# Altium PCB Two Stage Instrumentation Amplifier.PcbDoc
Units mil, origin at the board's own origin, x right, y up, seen from the top; angles counter-clockwise.
Board outline 4815 x 2205 mil, 2 copper layers (Top Layer, Bottom Layer); 61 components, 49 nets, 554 pads, 9 vias.
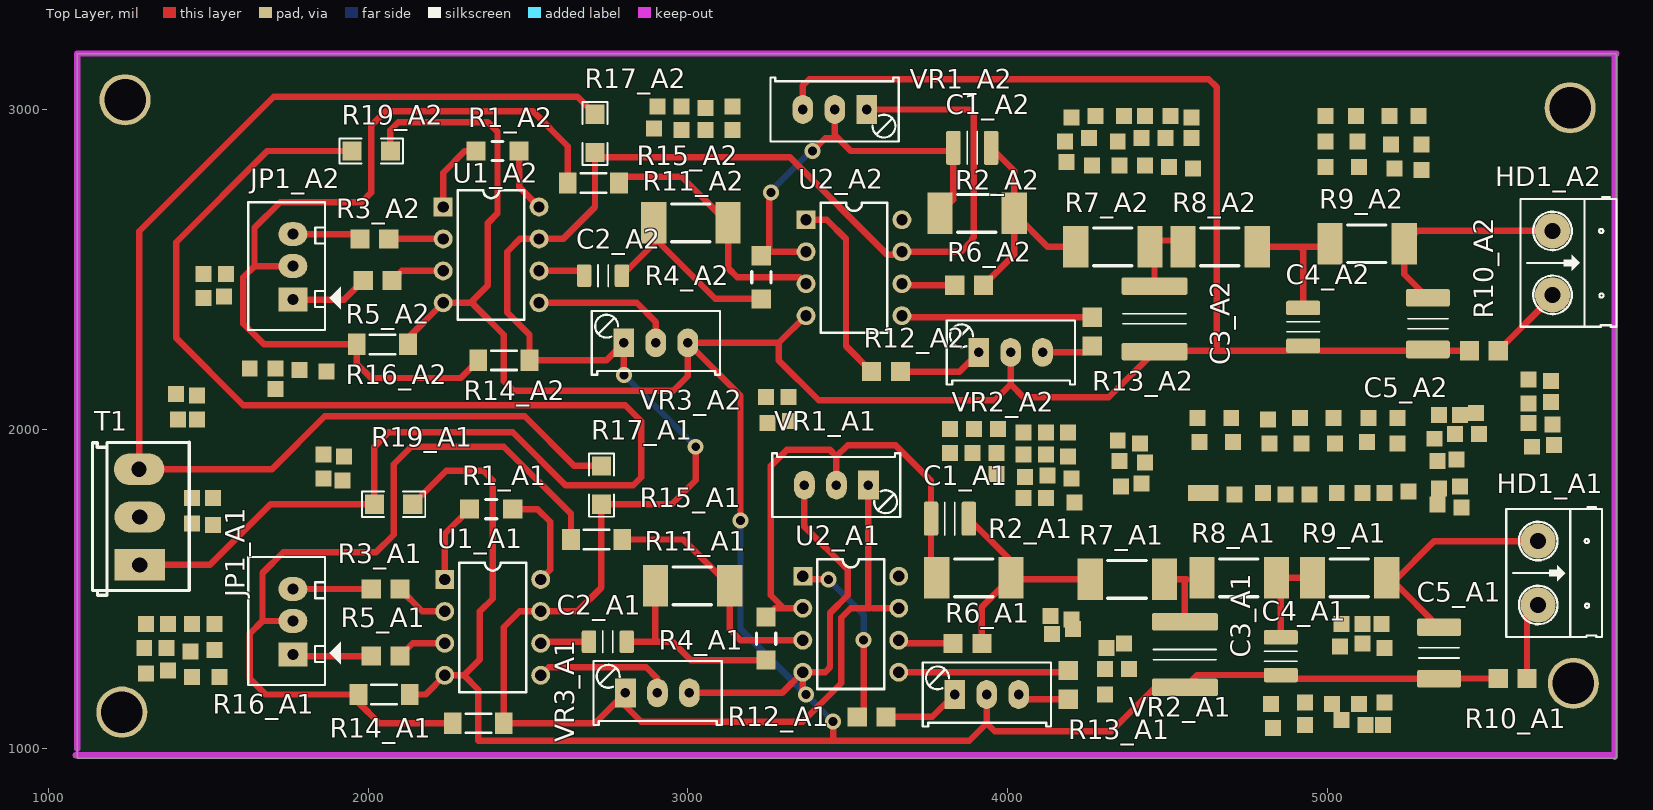
[diagram p0: Top Layer view]
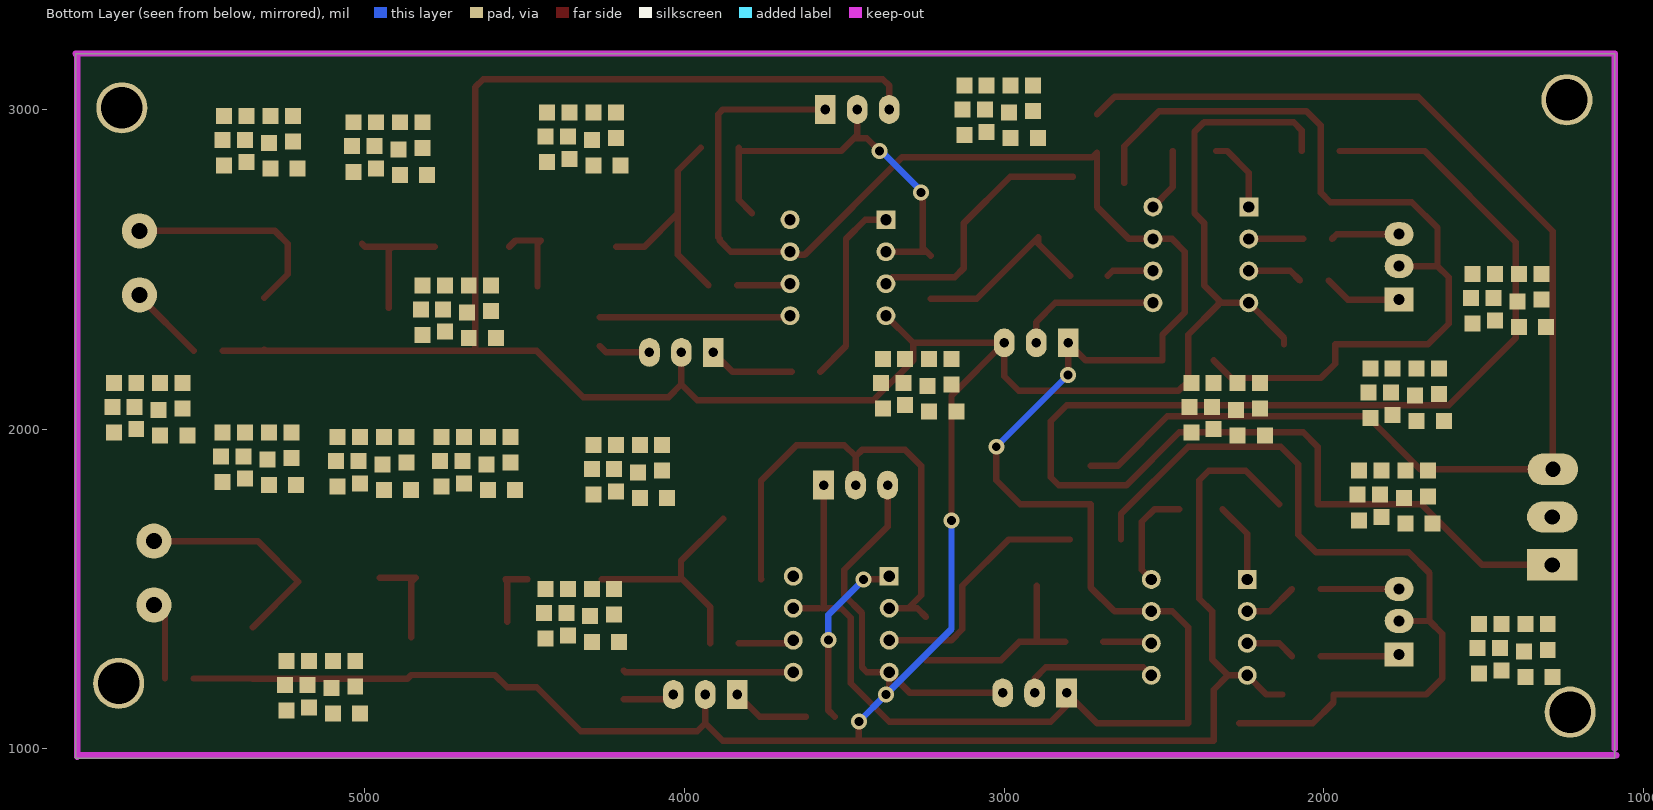
[diagram p1: Bottom Layer view, seen from below]

## Layer stack, top to bottom
Top Solder: solder mask 0.4, Solder Resist, Dk 3.5
Top Layer: signal copper 1.4
Dielectric 1: dielectric 12.6, FR-4, Dk 4.8
Bottom Layer: signal copper 1.4
Bottom Solder: solder mask 0.4, Solder Resist, Dk 3.5

## Board outline
1090,970 5905,970 5905,3175 1090,3175

## Design rules (kind name [scope] priority, off if disabled: settings)
Clearance [All] p1: gap=10
PolygonConnect [All] p1: connectstyle=Relief reliefconductorwidth=10 reliefentries=4 polygonreliefangle="90 Angle" airgapwidth=10
RoutingVias [All] p1: holewidth=28 width=50 viastyle="Through Hole" minholewidth=28 minwidth=50 maxholewidth=28 maxwidth=50
SolderMaskExpansion [All] p1: expansion=4
Width [All] p1: maxlimit=50 minlimit=10 preferedwidth=20 minimp=50.000000 maximp=50.000000 favimp=50.000000
30 further rules are at their usual default settings.

## Classes and differential pairs
component class Main: T1
channel class AD620_CA3140: Amp1 Amp2 Amp3 Amp4 Amp5 Amp6
component class A2: C1_A2 C2_A2 C3_A2 C4_A2 C5_A2 HD1_A2 JP1_A2 R1_A2 R2_A2 R3_A2 R4_A2 R5_A2 R6_A2 R7_A2 R8_A2 R9_A2 R10_A2 R11_A2 R12_A2 R13_A2 R14_A2 R15_A2 R16_A2 R17_A2 R19_A2 U1_A2 U2_A2 VR1_A2 VR2_A2 VR3_A2
component class A1: C1_A1 C2_A1 C3_A1 C4_A1 C5_A1 HD1_A1 JP1_A1 R1_A1 R2_A1 R3_A1 R4_A1 R5_A1 R6_A1 R7_A1 R8_A1 R9_A1 R10_A1 R11_A1 R12_A1 R13_A1 R14_A1 R15_A1 R16_A1 R17_A1 R19_A1 U1_A1 U2_A1 VR1_A1 VR2_A1 VR3_A1

## Components (designator, comment, footprint, x,y, rotation, side; value= is the part's Value field where it differs from the comment)
C1_A1 "6.8nF" CAPC3225X220N 3820,1720 r180 top (schematic designator C1)
C1_A2 "6.8nF" CAPC3225X220N 3890,2880 r180 top (schematic designator C1)
C2_A1 "1 uF" CAPC3216X180N 2750,1335 r0 top (schematic designator C2)
C2_A2 "1 uF" CAPC3216X180N 2735,2480 r0 top (schematic designator C2)
C3_A1 "220nF" CAPC5750X250N 4555,1295 r90 top (schematic designator C3)
C3_A2 "220nF" CAPC5750X250N 4460,2345 r90 top (schematic designator C3)
C4_A1 "220nF" CAPC3225X220N 4855,1290 r90 top (schematic designator C4)
C4_A2 "220nF" CAPC3225X220N 4925,2320 r90 top (schematic designator C4)
C5_A1 "220nF" CAPC4532X280N 5350,1300 r90 top (schematic designator C5)
C5_A2 "220nF" CAPC4532X280N 5315,2330 r90 top (schematic designator C5)
HD1_A1 "Header 2" HED2 5660,1650 r270 top (schematic designator HD1)
HD1_A2 "Header 2" HED2 5705,2620 r270 top (schematic designator HD1)
JP1_A1 "JP3" CON3 1765,1300 r90 top (schematic designator JP1)
JP1_A2 "JP3" CON3 1765,2410 r90 top (schematic designator JP1)
R1_A1 "2.2K" 1206big 2385,1750 r0 top (schematic designator R1)
R1_A2 "2.2K" 1206big 2405,2870 r0 top (schematic designator R1)
R2_A1 "1M" 2512 3895,1535 r180 top (schematic designator R2)
R2_A2 "1M" 2512 3905,2675 r180 top (schematic designator R2)
R3_A1 "0 ohm" 0805 2055,1500 r0 top (schematic designator R3)
R3_A2 "0 ohm" 0805 2020,2595 r0 top (schematic designator R3)
R4_A1 "2.2K" 1206big 3245,1345 r90 top (schematic designator R4)
R4_A2 "2.2K" 1206big 3230,2475 r90 top (schematic designator R4)
R5_A1 "0 ohm" 0805 2055,1290 r0 top (schematic designator R5)
R5_A2 "0 ohm" 0805 2030,2465 r0 top (schematic designator R5)
R6_A1 "0 ohm" 0805 3875,1330 r180 top (schematic designator R6)
R6_A2 "0 ohm" 0805 3880,2450 r180 top (schematic designator R6)
R7_A1 "25K" 2512 4375,1530 r180 top (schematic designator R7)
R7_A2 "25K" 2512 4330,2570 r180 top (schematic designator R7)
R8_A1 "25K" 2512 4725,1535 r180 top (schematic designator R8)
R8_A2 "25K" 2512 4665,2570 r180 top (schematic designator R8)
R9_A1 "25K" 2512 5070,1535 r180 top (schematic designator R9)
R9_A2 "25K" 2512 5125,2580 r180 top (schematic designator R9)
R10_A1 "4.7K" 0805 5580,1220 r180 top (schematic designator R10)
R10_A2 "4.7K" 0805 5490,2245 r180 top (schematic designator R10)
R11_A1 "1M" 2512 3015,1510 r180 top (schematic designator R11)
R11_A2 "1M" 2512 3010,2645 r180 top (schematic designator R11)
R12_A1 "1K" 0805 3575,1100 r180 top (schematic designator R12)
R12_A2 "1K" 0805 3620,2180 r180 top (schematic designator R12)
R13_A1 "1K" 0805 4190,1200 r90 top (schematic designator R13)
R13_A2 "1K" 0805 4265,2305 r90 top (schematic designator R13)
R14_A1 "15K" 1806L 2345,1080 r0 top (schematic designator R14)
R14_A2 "15K" 1806L 2425,2215 r0 top (schematic designator R14)
R15_A1 "0 ohm" 1806L 2715,1655 r0 top (schematic designator R15)
R15_A2 "0 ohm" 1806L 2705,2770 r0 top (schematic designator R15)
R16_A1 "15K" 1806L 2050,1170 r180 top (schematic designator R16)
R16_A2 "15K" 1806L 2045,2265 r180 top (schematic designator R16)
R17_A1 "4.7K" 1206 2730,1825 r270 top (schematic designator R17)
R17_A2 "4.7K" 1206 2710,2925 r270 top (schematic designator R17)
R19_A1 "4.7K" 1206 2080,1765 r0 top (schematic designator R19)
R19_A2 "4.7K" 1206 2010,2870 r0 top (schematic designator R19)
T1 "Terminal Block 3Pin" "Terminal Block 3 Pin Pitch 150mil" 1285,1725 r90 top
U1_A1 "AD620AN" N-8 2390,1380 r270 top (schematic designator U1)
U1_A2 "AD620AN" N-8 2385,2545 r270 top (schematic designator U1)
U2_A1 "AD548AQ" Q-8 3510,1390 r270 top (schematic designator U2)
U2_A2 "AD548AQ" Q-8 3520,2505 r270 top (schematic designator U2)
VR1_A1 "10K" VR1 3565,1825 r180 top (schematic designator VR1)
VR1_A2 "10K" VR1 3560,3000 r180 top (schematic designator VR1)
VR2_A1 "10K" VR1 3835,1170 r0 top (schematic designator VR2)
VR2_A2 "10K" VR1 3910,2240 r0 top (schematic designator VR2)
VR3_A1 "10K" VR1 2805,1175 r0 top (schematic designator VR3)
VR3_A2 "10K" VR1 2800,2270 r0 top (schematic designator VR3)

## Footprints (in the part's own frame and the unit in brackets; to place one, negate y for a bottom-side part, rotate by r counter-clockwise, add the part's x,y. Pads: shape width x height; smd on the part's side, far side on the other; paste and mask are expansions set on the pad)
0805 [mil] "0805 case"
  rect 60x60 smd: 1(-45,0) 2(45,0)
  body extent -40,-25 39,24, height 19
1206 [mil]
  rect 60x60 smd: 1(-60,0) 2(60,0)
  silkscreen extent -99,-39 99,39, body extent -61,-31 61,31, height 19
1206big [mil] "EDISP100"
  rect 60x60 smd: 1(-67.5,0) 2(67.5,0)
  silkscreen extent -18,-30 18,30, body extent -60,-30 62,31, height 19
1806L [mm]
  rect 1.4x1.7 smd: 1(-2.032,0) 2(2.032,0)
  silkscreen extent -1.02,-0.76 1.02,0.76, body extent -2.25,-0.8 2.25,0.8, height 1.59
2512 [mm]
  rect 2x3.3 smd: 1(-2.95,0) 2(2.95,0)
  silkscreen extent -1.5,-1.5 1.55,1.5, body extent -3.15,-1.48 3.2,1.52, height 1.6
CAPC3216X180N [mm] "Chip Capacitor, Body 3.2x1.6mm, 1.8mm H, EIA 1206, IPC Medium Density"
  round 0.508 on Mech15: 0(0,0)
  rrect25% 1.15x1.8 smd: 1(-1.5,0) 2(1.5,0)
  silkscreen extent -0.4,-0.88 0.4,0.88, body extent -1.7,-0.9 1.7,0.9, height 1.8
CAPC3225X220N [mm] "Chip Capacitor, Body 3.2x2.5mm, EIA 1210, IPC Medium Density"
  round 0.508 on Mech15: 0(0,0)
  rrect25% 1.15x2.7 smd: 1(-1.5,0) 2(1.5,0)
  silkscreen extent -0.4,-1.3 0.4,1.3, body extent -1.8,-1.4 1.8,1.4, height 2.19
CAPC4532X280N [mm] "Chip Capacitor, Body 4.5x3.2mm, 1812, IPC Medium Density"
  round 0.508 on Mech15: 0(0,0)
  rrect25% 1.4x3.5 smd: 1(-2.05,0) 2(2.05,0)
  silkscreen extent -0.4,-1.6 0.4,1.6, body extent -2.45,-1.8 2.45,1.8, height 2.79
CAPC5750X250N [mm] "Chip Capacitor, Body 5.7x5.0mm, 2220, IPC Medium Density"
  round 0.508 on Mech15: 0(0,0)
  rrect25% 1.4x5.25 smd: 1(-2.6,0) 2(2.6,0)
  silkscreen extent -0.4,-2.5 0.4,2.5, body extent -3.05,-2.7 3.05,2.7, height 2.49
CON3 [mil] "CON 3"
  rect 75x90 hole 34: 1(-5,0)
  oval 75x90 hole 34: 2(100,0) 3(200,0)
  silkscreen extent -100,-150 300,140, body extent -95,-90 295,136, height 276
HED2 [mil] "Header 2, 2 pin, hight 300mil, Pin to Pin 200, Colour Green"
  round 110 hole 50: 1(0,0) 2(200,0)
  silkscreen extent -106,-100 300,200, body extent -92,-140 302,155, height 394
N-8 [mm] "DIP; 8 Leads; Row Spacing 7.62 mm; Pitch 2.54 mm"
  rect 1.5x1.5 hole 0.9: 1(-3.81,-3.81)
  round 1.5 hole 0.9: 2(-1.27,-3.81) 3(1.27,-3.81) 4(3.81,-3.81) 5(3.81,3.81) 6(1.27,3.81) 7(-1.27,3.81) 8(-3.81,3.81)
  silkscreen extent -5.15,-2.65 5.15,2.65
Q-8 [mm] "DIP; 8 Leads; Row Spacing 7.62 mm; Pitch 2.54 mm"
  rect 1.5x1.5 hole 0.9: 1(-3.81,-3.81)
  round 1.5 hole 0.9: 2(-1.27,-3.81) 3(1.27,-3.81) 4(3.81,-3.81) 5(3.81,3.81) 6(1.27,3.81) 7(-1.27,3.81) 8(-3.81,3.81)
  silkscreen extent -5.15,-2.65 5.15,2.65
"Terminal Block 3 Pin Pitch 150mil" [mm] "Terminal atornillable 2 salidas"
  rect 2.5x4 hole 1.2: 1(-3.803,-0.023)
  oval 2.5x4 hole 1.2: 2(0.007,-0.023) 3(3.803,0.023)
  silkscreen extent -6.21,-3.96 5.95,3.73, body extent -5.77,-3.82 5.86,3.68, height 8.5
VR1 [mil] "Variable Resistor"
  rect 65x90 hole 30: 1(0,0)
  oval 65x90 hole 30: 2(100,0) 3(200,0)
  silkscreen extent -100,-100 301,100, body extent -88,-130 288,110, height 455

## Part data
C1_A1 C1_A2 C2_A1 C2_A2 C3_A1 C3_A2 C4_A1 C4_A2 C5_A1 C5_A2: library part "Ceramic Capacitor, SMD.", "Ceramic Capacitor, SMD."
HD1_A1 HD1_A2: library part Hed2, "Header 2 (Green)"
JP1_A1 JP1_A2: library part Con3, "Connector 3"
R1_A1 R1_A2 R2_A1 R2_A2 R3_A1 R3_A2 R4_A1 R4_A2 R5_A1 R5_A2 R6_A1 R6_A2 R7_A1 R7_A2 R8_A1 R8_A2 R9_A1 R9_A2 R10_A1 R10_A2 R11_A1 R11_A2 R12_A1 R12_A2 R13_A1 R13_A2 R14_A1 R14_A2 R15_A1 R15_A2 R16_A1 R16_A2 R17_A1 R17_A2 R19_A1 R19_A2: library part "Resistior SMD General", "Resistor Surface Mount Package"
T1: "Terminal Block, 3Pin"
U1_A1 U1_A2: "Low-Cost, Low-Power Instrumentation Amplifier"
U2_A1 U2_A2: "Precision, Low-Power BiFET Op Amp"
VR1_A1 VR1_A2 VR2_A1 VR2_A2 VR3_A1 VR3_A2: library part VR, "Var Resistor"

## Free pads (board coordinates)
  rect 50x50 smd: 0(4595,2035) 1(4700,2035) 2(4815,2030) 3(4915,2035) 4(5020,2035) 5(5130,2035) 6(5220,2035) 7(4600,1960) 8(4705,1960) 9(4820,1955) 10(4920,1955) 11(5025,1955) 12(5125,1960) 13(5220,1955) 14(1710,2190) 15(1785,2185) 16(1870,2180) 17(1630,2190) 18(1710,2125) 19(1485,2485) 20(1485,2410) 21(1555,2485) 22(1550,2415) 23(4050,1990) 24(4120,1990) 25(4050,1920) 26(4120,1920) 27(4055,1850) 28(4125,1855) 29(4120,1785) 30(4050,1785) 31(4190,1990) 32(4190,1915) 33(4200,1845) 34(4210,1770) 35(3970,2000) 36(3895,2000) 37(3820,2000) 38(3890,1925) 39(3820,1925) 40(3965,1925) 41(3965,1860) 42(1305,1390) 43(1375,1390) 44(1450,1390) 45(1520,1390) 46(1520,1310) 47(1445,1305) 48(1370,1315) 49(1300,1315) 50(1305,1235) 51(1375,1245) 52(1450,1225) 53(1535,1225) 54(1400,2110) 55(1465,2105) 56(1405,2030) 57(1465,2030) 58(1450,1785) 59(1515,1785) 60(1515,1700) 61(1450,1705) 62(1860,1920) 63(1925,1915) 64(1920,1840) 65(1860,1845) 66(3245,2100) 67(3315,2100) 68(3320,2025) 69(3250,2020) 70(4345,1965) 71(4350,1900) 72(4415,1955) 73(4430,1895) 74(4355,1820) 75(4420,1830) 76(4200,2975) 77(4275,2980) 78(4365,2980) 79(4430,2980) 80(4510,2980) 81(4575,2975) 82(4575,2910) 83(4495,2910) 84(4420,2910) 85(4345,2900) 86(4255,2910) 87(4180,2900) 88(4185,2835) 89(4265,2825) 90(4350,2825) 91(4430,2825) 92(4505,2820) 93(4580,2815) 94(2905,3010) 95(2980,3010) 96(3055,3005) 97(3140,3010) 98(3140,2935) 99(3055,2935) 100(2980,2935) 101(2895,2940) 102(4135,1415) 103(4140,1360) 104(4200,1405) 105(4205,1375) 106(4310,1315) 107(4365,1330) 108(4380,1250) 109(4305,1250) 110(4305,1170) 111(5045,1390) 112(5110,1390) 113(5110,1330) 114(5040,1320) 115(5170,1390) 116(5180,1315) 117(5180,1145) 118(5100,1140) 119(5015,1140) 120(4930,1145) 121(4825,1140) 122(4830,1065) 123(4930,1075) 124(5045,1090) 125(5120,1075) 126(5175,1075) 127(5630,2155) 128(5700,2150) 129(5700,2085) 130(5630,2080) 131(5630,2020) 132(5705,2015) 133(5710,1950) 134(5640,1945) 135(5350,2045) 136(5415,2045) 137(5465,2050) 138(5475,1985) 139(5400,1985) 140(5335,1970) 141(5345,1900) 142(5405,1905) 143(5415,1820) 144(5350,1815) 145(5345,1765) 146(5420,1755) 147(5255,1805) 148(5180,1800) 149(5110,1800) 150(5030,1800) 151(4945,1795) 152(4870,1795) 153(4800,1800) 154(4710,1795) 155(4635,1800) 156(4590,1800) 157(4995,2980) 158(5090,2980) 159(5195,2980) 160(5285,2980) 161(5295,2890) 162(5200,2890) 163(5095,2900) 164(4995,2900) 165(4995,2820) 166(5100,2820) 167(5210,2815) 168(5295,2810)
  rect 50x50 smd far side: 42(1515,1390) 42(1535,2485) 42(1855,2190) 42(1890,1870) 42(2415,2145) 42(3125,3075) 42(3380,2220) 42(4285,1950) 42(4430,2990) 42(4435,1500) 42(4760,1975) 42(4820,2450) 42(5035,2960) 42(5085,1975) 42(5245,1275) 42(5440,2980) 42(5445,1990) 42(5785,2145) 43(1445,1390) 43(1465,2485) 43(1785,2190) 43(1820,1870) 43(2345,2145) 43(3055,3075) 43(3310,2220) 43(4215,1950) 43(4360,2990) 43(4365,1500) 43(4690,1975) 43(4750,2450) 43(4965,2960) 43(5015,1975) 43(5175,1275) 43(5370,2980) 43(5375,1990) 43(5715,2145) 44(1370,1390) 44(1390,2485) 44(1710,2190) 44(1745,1870) 44(2270,2145) 44(2980,3075) 44(3235,2220) 44(4140,1950) 44(4285,2990) 44(4290,1500) 44(4615,1975) 44(4675,2450) 44(4890,2960) 44(4940,1975) 44(5100,1275) 44(5295,2980) 44(5300,1990) 44(5640,2145) 45(1300,1390) 45(1320,2485) 45(1640,2190) 45(1675,1870) 45(2200,2145) 45(2910,3075) 45(3165,2220) 45(4070,1950) 45(4215,2990) 45(4220,1500) 45(4545,1975) 45(4605,2450) 45(4820,2960) 45(4870,1975) 45(5030,1275) 45(5225,2980) 45(5230,1990) 45(5570,2145) 46(1300,1310) 46(1320,2405) 46(1640,2110) 46(1675,1790) 46(2200,2065) 46(2910,2995) 46(3165,2140) 46(4070,1870) 46(4215,2910) 46(4220,1420) 46(4545,1895) 46(4605,2370) 46(4820,2880) 46(4870,1895) 46(5030,1195) 46(5225,2900) 46(5230,1910) 46(5570,2065) 47(1375,1305) 47(1395,2400) 47(1715,2105) 47(1750,1785) 47(2275,2060) 47(2985,2990) 47(3240,2135) 47(4145,1865) 47(4290,2905) 47(4295,1415) 47(4620,1890) 47(4680,2365) 47(4895,2875) 47(4945,1890) 47(5105,1190) 47(5300,2895) 47(5305,1905) 47(5645,2060) 48(1450,1315) 48(1470,2410) 48(1790,2115) 48(1825,1795) 48(2350,2070) 48(3060,3000) 48(3315,2145) 48(4220,1875) 48(4365,2915) 48(4370,1425) 48(4695,1900) 48(4755,2375) 48(4970,2885) 48(5020,1900) 48(5180,1200) 48(5375,2905) 48(5380,1915) 48(5720,2070) 49(1520,1315) 49(1540,2410) 49(1860,2115) 49(1895,1795) 49(2420,2070) 49(3130,3000) 49(3385,2145) 49(4290,1875) 49(4435,2915) 49(4440,1425) 49(4765,1900) 49(4825,2375) 49(5040,2885) 49(5090,1900) 49(5250,1200) 49(5445,2905) 49(5450,1915) 49(5790,2070) 50(1515,1235) 50(1535,2330) 50(1855,2035) 50(1890,1715) 50(2415,1990) 50(3125,2920) 50(3380,2065) 50(4285,1795) 50(4430,2835) 50(4435,1345) 50(4760,1820) 50(4820,2295) 50(5035,2805) 50(5085,1820) 50(5245,1120) 50(5440,2825) 50(5445,1835) 50(5785,1990) 51(1445,1245) 51(1465,2340) 51(1785,2045) 51(1820,1725) 51(2345,2000) 51(3055,2930) 51(3310,2075) 51(4215,1805) 51(4360,2845) 51(4365,1355) 51(4690,1830) 51(4750,2305) 51(4965,2815) 51(5015,1830) 51(5175,1130) 51(5370,2835) 51(5375,1845) 51(5715,2000) 52(1370,1225) 52(1390,2320) 52(1710,2025) 52(1745,1705) 52(2270,1980) 52(2980,2910) 52(3235,2055) 52(4140,1785) 52(4285,2825) 52(4290,1335) 52(4615,1810) 52(4675,2285) 52(4890,2795) 52(4940,1810) 52(5100,1110) 52(5295,2815) 52(5300,1825) 52(5640,1980) 53(1285,1225) 53(1305,2320) 53(1625,2025) 53(1660,1705) 53(2185,1980) 53(2895,2910) 53(3150,2055) 53(4055,1785) 53(4200,2825) 53(4205,1335) 53(4530,1810) 53(4590,2285) 53(4805,2795) 53(4855,1810) 53(5015,1110) 53(5210,2815) 53(5215,1825) 53(5555,1980)
  round 160 hole 130: 169(1240,3030) 170(1230,1115) 171(5770,1205) 172(5760,3005)

## Via types
v1: diameter 50, hole 28, Top Layer to Bottom Layer, 9 vias

## Nets (pads, with @x,y where several pads share a name; then routed paths per layer and width w, separated by ;. In a path a pad name is that pad's centre, name@x,y a point inside that pad or via, vN(x,y) a via of type N, cw(c..) or ccw(c..) an arc to the next point about the centre after c; other vN are vias at no path point)
GND: C3_A1.1 C3_A2.1 C4_A1.1 C4_A2.1 C5_A1.1 C5_A2.1 R10_A1.2 R10_A2.2 R16_A1.1 R16_A2.1 R19_A1.2 R19_A2.2 U1_A1.4 U1_A2.4 U2_A1.4 U2_A2.4 VR1_A1.3 VR1_A2.3 VR2_A1.2 VR2_A2.2 VR3_A1.3 VR3_A2.3 | length 14740.3
  Top Layer w20: R19_A2.2 2070,2935 2095,2960 2375,2960 2405,2930 2405,2675 2375,2645 2375,2450 2330,2405 ; R16_A2.1 2125,2285 U1_A2.4 2320,2395 2330,2405 ; R16_A1.1 2180,1170 U1_A1.4 2300,1230 ; R19_A1.2 2245,1870 2360,1870 2390,1840 2390,1470 2350,1430 2350,1280 2300,1230 ; VR3_A1.3 3295,1175 U2_A1.4 ; v1(3165,1715) 3165,2105 VR3_A2.3 ; VR1_A2.3 3360,3075 3380,3095 4630,3095 4655,3070 4655,2245 ; VR1_A1.3 3365,1695 3500,1560 3500,1480 3445,1425 3445,1255 3430,1240 U2_A1.4 ; v1(3370,1170) 3360,1180 U2_A1.4 ; U2_A2.4 3285,2270 ; v1(3455,1085) 3455,1025 ; VR2_A1.2 3935,1080 ; VR2_A2.2 4010,2140 ; C5_A2.1 C5_A2.1@5319.29,2245 ; R10_A2.2 C5_A2.1@5319.29,2245 ; R10_A1.2 5350.71,1220 C5_A1.1 4866.65,1219.29 C4_A1.1 4593.31,1230.94 C3_A1.1 4462.64,1192.64 4325,1055 3960,1055 3935,1080 ; 2300,1230 2345,1185 2345,1025 3455,1025 ; 2330,2405 2330,2390 2425,2295 2425,2150 2455,2120 2955,2120 3000,2165 VR3_A2.3 ; VR3_A2.3 3285,2270 ; 3285,2270 3285,2215 3410,2090 3960,2090 4010,2140 ; 3455,1025 3880,1025 3935,1080 ; 4010,2140 4050,2100 4317.36,2100 C3_A2.1 4462.36,2245 4655,2245 ; 4655,2245 C5_A2.1@5319.29,2245
  Bottom Layer w20: v1(3165,1715) 3165,1375 v1(3370,1170) v1(3455,1085)
NetC1_A1_1: C1_A1.1 R2_A1.1 R6_A1.1 R7_A1.2 | length 732.3
  Top Layer w20: C1_A1.1 4011.14,1587.91 R2_A1.1 ; R6_A1.1 3920,1443.86 R2_A1.1 ; R7_A1.2 4016.14,1530 R2_A1.1
NetC1_A1_2: C1_A1.2 R2_A1.2 R4_A1.2 U2_A1.2 VR1_A1.2 | length 1577.8
  Top Layer w20: R4_A1.2 3272.5,1440 3300,1440 ; U2_A1.2 3300,1440 ; VR1_A1.2 3465,1915 ; R2_A1.2@3760,1530 3760.94,1530.94 C1_A1.2 3760.94,1839.06 3650,1950 3500,1950 3465,1915 ; 3300,1440 3260,1480 3260,1885 3310,1935 3445,1935 3465,1915
NetC1_A2_1: C1_A2.1 R2_A2.1 R6_A2.1 R7_A2.2 | length 735.9
  Top Layer w20: R6_A2.1 4021.14,2546.14 R2_A2.1 ; C1_A2.1 4021.14,2807.91 R2_A2.1 ; R7_A2.2 4126.14,2570 R2_A2.1
NetC1_A2_2: C1_A2.2 R2_A2.2 R4_A2.2 U2_A2.2 VR1_A2.2 | length 1314.9
  Top Layer w20: R4_A2.2 R4_A2.2@3242.5,2555 ; v1(3260,2740) 3255,2735 3255,2567.5 R4_A2.2@3242.5,2555 ; U2_A2.2 R4_A2.2@3242.5,2555 ; v1(3390,2870) 3430,2910 3470,2910 ; VR1_A2.2 3460,2920 3470,2910 ; R2_A2.2 3830.94,2717.09 C1_A2.2@3830.94,2870 ; C1_A2.2 C1_A2.2@3830.94,2870 ; 3470,2910 3510,2870 C1_A2.2@3830.94,2870
  Bottom Layer w20: v1(3260,2740) 3260,2745 3385,2870 v1(3390,2870)
NetC2_A1_1: C2_A1.1 U1_A1.6 | length 153
  Top Layer w20: U1_A1.6 2545,1335 C2_A1.1
NetC2_A1_2: C2_A1.2 R4_A1.1 R11_A1.2 | length 635.2
  Top Layer w20: C2_A1.2 2900,1335 ; R11_A1.2 2898.86,1336.14 2900,1335 ; R4_A1.1 3010,1277.5 2952.5,1335 2900,1335
NetC2_A2_1: C2_A2.1 U1_A2.6 | length 147.2
  Top Layer w20: U1_A2.6 2660.95,2495 C2_A2.1
NetC2_A2_2: C2_A2.2 R4_A2.1 R11_A2.2 | length 577.2
  Top Layer w20: C2_A2.2 2893.86,2579.8 2893.86,2600 3086.36,2407.5 R4_A2.1
NetC3_A1_2: C3_A1.2 R7_A1.1 R8_A1.2 | length 203.6
  Top Layer w20: R7_A1.1 4560,1530 4555,1525 C3_A1.2
NetC3_A2_2: C3_A2.2 R7_A2.1 R8_A2.2 | length 253.9
  Top Layer w20: C3_A2.2 4460,2580 4450,2590 4528.86,2590 R8_A2.2
NetC4_A1_2: C4_A1.2 R8_A1.1 R9_A1.2 | length 304.4
  Top Layer w20: C4_A1.2 4855,1521.14 R8_A1.1 R9_A1.2
NetC4_A2_2: C4_A2.2 R8_A2.1 R9_A2.2 | length 426.9
  Top Layer w20: R8_A2.1 4915,2570 ; C4_A2.2 4925,2560 4915,2570 ; R9_A2.2 4998.86,2570 4915,2570
NetC5_A1_2: C5_A1.2 HD1_A1.1 R9_A1.1 | length 705.8
  Top Layer w20: C5_A1.2 5207.85,1522.85 5335,1650 HD1_A1.1
NetC5_A2_2: C5_A2.2 HD1_A2.1 R9_A2.1 | length 680.3
  Top Layer w20: C5_A2.2 5241.14,2484.57 R9_A2.1 5281.14,2620 HD1_A2.1
NetHD1_A1_2: HD1_A1.2 R10_A1.1 | length 244.5
  Top Layer w20: R10_A1.1 5625,1415 HD1_A1.2
NetHD1_A2_2: HD1_A2.2 R10_A2.1 | length 245.4
  Top Layer w20: R10_A2.1 5705,2415 HD1_A2.2
NetJP1_A1_1: JP1_A1.1 R5_A1.1 | length 247.1
  Top Layer w20: JP1_A1.1 1770,1290 R5_A1.1
NetJP1_A1_2: JP1_A1.2 R14_A1.1 R15_A1.1 R16_A1.2 | length 2573.7
  Top Layer w20: JP1_A1.2 1670,1400 ; R14_A1.1 2035,1080 1970,1145 R16_A1.2 1680,1170 1630,1220 1630,1360 1670,1400 ; R15_A1.1 2635,1735 2425,1945 2135,1945 2080,1890 2080,1670 2025,1615 1735,1615 1670,1550 1670,1400
NetJP1_A1_3: JP1_A1.3 R3_A1.1 | length 245
  Top Layer w20: JP1_A1.3 R3_A1.1
NetJP1_A2_1: JP1_A2.1 R5_A2.1 | length 244.9
  Top Layer w20: JP1_A2.1 1925,2405 R5_A2.1
NetJP1_A2_2: JP1_A2.2 R14_A2.1 R15_A2.1 R16_A2.2 | length 2712.6
  Top Layer w20: JP1_A2.2 1645,2510 ; R14_A2.1 2290,2160 2010,2160 1965,2205 R16_A2.2 1675,2265 1610,2330 1610,2475 1645,2510 ; R15_A2.1 2625,2885 2515,2995 2055,2995 2010,2950 2010,2740 1980,2710 1725,2710 1645,2630 1645,2510
NetJP1_A2_3: JP1_A2.3 R3_A2.1 | length 216.2
  Top Layer w20: JP1_A2.3 1960,2610 R3_A2.1
NetR1_A1_1: R1_A1.1 U1_A1.1 | length 252.1
  Top Layer w20: U1_A1.1 2240,1672.5 R1_A1.1
NetR1_A1_2: R1_A1.2 U1_A1.8 | length 326.5
  Top Layer w20: R1_A1.2 2530,1750 2570,1710 2570,1560 U1_A1.8
NetR1_A2_1: R1_A2.1 U1_A2.1 | length 238
  Top Layer w20: U1_A2.1 2235,2802.5 2302.5,2870 R1_A2.1
NetR1_A2_2: R1_A2.2 U1_A2.8 | length 200.9
  Top Layer w20: R1_A2.2 2472.5,2757.5 U1_A2.8
NetR3_A1_2: R3_A1.2 U1_A1.2 | length 169
  Top Layer w20: R3_A1.2 2170,1430 U1_A1.2
NetR3_A2_2: R3_A2.2 U1_A2.2 | length 170
  Top Layer w20: R3_A2.2 U1_A2.2
NetR5_A1_2: R5_A1.2 U1_A1.3 | length 156.6
  Top Layer w20: R5_A1.2 2140,1330 U1_A1.3
NetR5_A2_2: R5_A2.2 U1_A2.3 | length 172.4
  Top Layer w20: R5_A2.2 2105,2495 U1_A2.3
NetR6_A1_2: R6_A1.2 U2_A1.6 | length 174.1
  Top Layer w20: U2_A1.6 3670,1330 R6_A1.2
NetR6_A2_2: R6_A2.2 U2_A2.6 | length 167.1
  Top Layer w20: U2_A2.6 3675,2450 R6_A2.2
NetR11_A1_1: R11_A1.1 R15_A1.2 U2_A1.3 | length 775.2
  Top Layer w20: R15_A1.2 2986.14,1655 R11_A1.1 3131.14,1373.86 3165,1340 U2_A1.3
NetR11_A2_1: R11_A2.1 R15_A2.2 U2_A2.3 | length 806.4
  Top Layer w20: R15_A2.2@2785,2790 2981.14,2790 R11_A2.1 3126.14,2503.86 3155,2475 3350,2475 U2_A2.3
NetR12_A1_1: R12_A1.1 VR2_A1.1 | length 244
  Top Layer w20: R12_A1.1 3765,1100 VR2_A1.1
NetR12_A1_2: R12_A1.2 U2_A1.1 | length 568
  Top Layer w20: U2_A1.1 3370,1530 v1(3440,1530) ; R12_A1.2 3550,1120 v1(3550,1340)
  Bottom Layer w20: v1(3440,1530) 3550,1420 v1(3550,1340)
NetR12_A2_1: R12_A2.1 VR2_A2.1 | length 269.9
  Top Layer w20: R12_A2.1 3850,2180 VR2_A2.1
NetR12_A2_2: R12_A2.2 U2_A2.1 | length 598
  Top Layer w20: U2_A2.1 3435,2655 3495,2595 3495,2260 R12_A2.2
NetR13_A1_1: R13_A1.1 VR2_A1.3 | length 161.2
  Top Layer w20: VR2_A1.3 4050,1155 R13_A1.1
NetR13_A1_2: R13_A1.2 U2_A1.5 | length 532.1
  Top Layer w20: U2_A1.5 4185,1240 R13_A1.2
NetR13_A2_1: R13_A2.1 VR2_A2.3 | length 163.3
  Top Layer w20: VR2_A2.3 4245,2240 R13_A2.1
NetR13_A2_2: R13_A2.2 U2_A2.5 | length 597.1
  Top Layer w20: U2_A2.5 3675,2350 R13_A2.2
NetR17_A1_1: R17_A1.1 R17_A2.1 T1.3 | length 3946
  Top Layer w20: R17_A2.1 2655,3040 1705,3040 1284.11,2619.11 T1.3 1699.71,1874.71 1865,2040 2490,2040 2645,1885 R17_A1.1
NetR19_A1_1: R19_A1.1 R19_A2.1 T1.1 | length 4630.8
  Top Layer w20: T1.1 1505.29,1575.29 1695,1765 R19_A1.1 2020,1945 2065,1990 2452.57,1990 2617.57,1825 2830,1825 2855,1850 2855,2025 2805,2075 1610,2075 1400,2285 1400,2585 1685,2870 R19_A2.1
NetT1_2: T1.2
NetU1_A1_5: U1_A1.5 VR3_A1.2 | length 434.9
  Top Layer w20: U1_A1.5 2565,1255 2870,1255 2905,1220 VR3_A1.2
NetU1_A2_5: U1_A2.5 VR3_A2.2 | length 454.9
  Top Layer w20: U1_A2.5 2840,2395 2900,2335 VR3_A2.2
VCC: R14_A1.2 R14_A2.2 R17_A1.2 R17_A2.2 U1_A1.7 U1_A2.7 U2_A1.7 U2_A2.7 VR1_A1.1 VR1_A2.1 VR3_A1.1 VR3_A2.1 | length 7004.5
  Top Layer w20: v1(2800,2170) VR3_A2.1 2745,2215 R14_A2.2 2505,2295 2435,2365 2435,2555 2475,2595 U1_A2.7 2610,2595 2710,2695 R17_A2.2 2725,2850 3320,2850 3625,2545 3660,2545 U2_A2.7 3855,2555 3890,2590 3890,2595 3895,2600 3895,2985 3880,3000 VR1_A2.1 ; v1(3025,1945) 3025,1840 2950,1765 R17_A1.2 2730,1505 2655,1430 U1_A1.7 2475,1430 2425,1380 R14_A1.2 2710,1080 VR3_A1.1 2805,1135 2855,1085 3360,1085 3480,1205 3480,1410 3510,1440 3570,1440 3565,1445 VR1_A1.1 ; 3580,1440 U2_A1.7
  Bottom Layer w20: v1(2800,2170) v1(3025,1945)
pads on no net: C1_A1.0 C1_A2.0 C2_A1.0 C2_A2.0 C3_A1.0 C3_A2.0 C4_A1.0 C4_A2.0 C5_A1.0 C5_A2.0 U2_A1.8 U2_A2.8

## Keep-outs
Keep-Out Layer:
  lines w20: 1085,980 5895,980 5900,975 5900,1005 5900,3170 5905,3175 1090,3175 1090,1000